# Altium PCB LF_SFF_AC_DC.PcbDoc
Units mm, origin at the board's own origin, x right, y up, seen from the top; angles counter-clockwise.
Board outline 100 x 100 mm, 2 copper layers (Top Layer, Bottom Layer); 65 components, 134 nets, 450 pads, 39 vias.
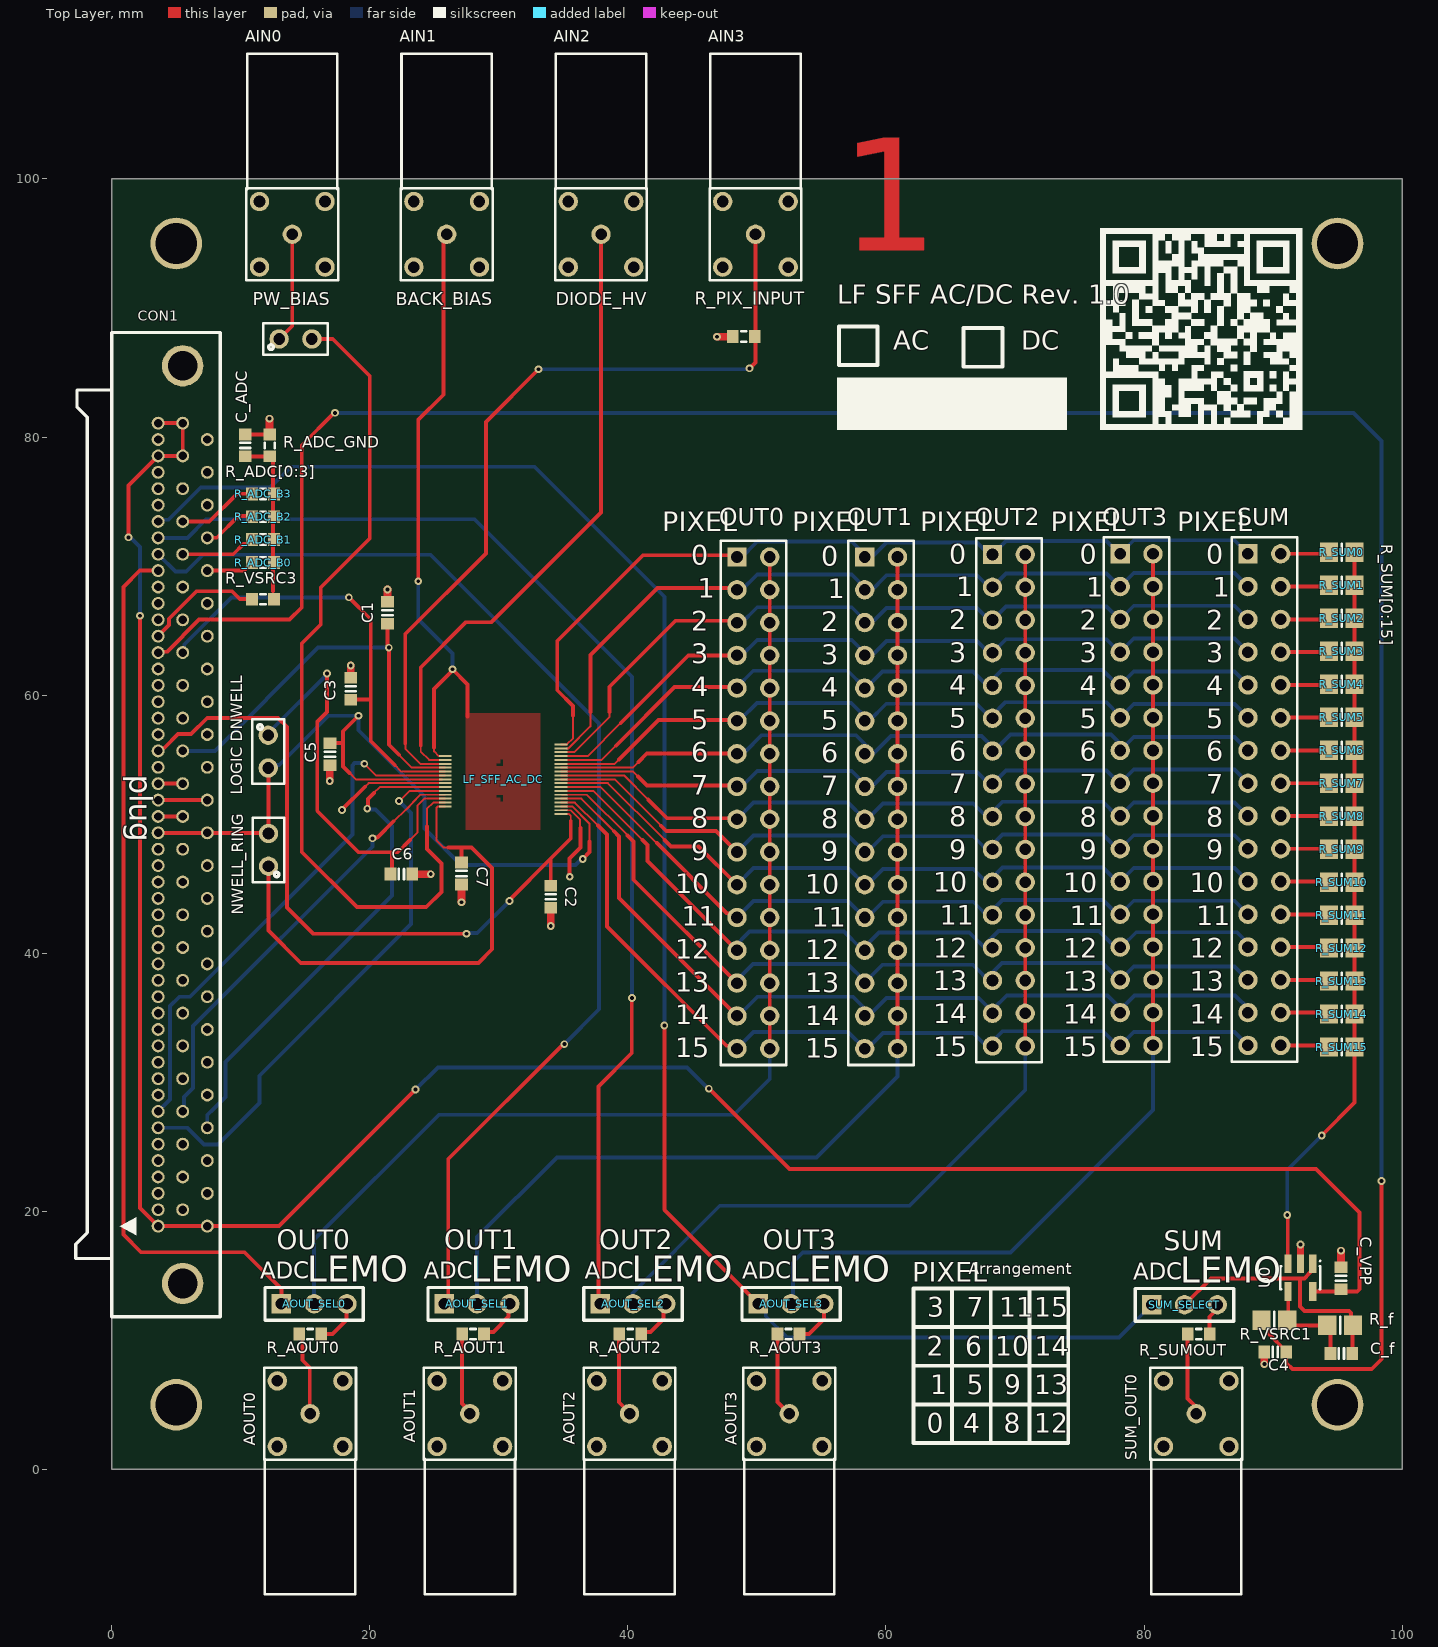
[diagram p0: Top Layer view]
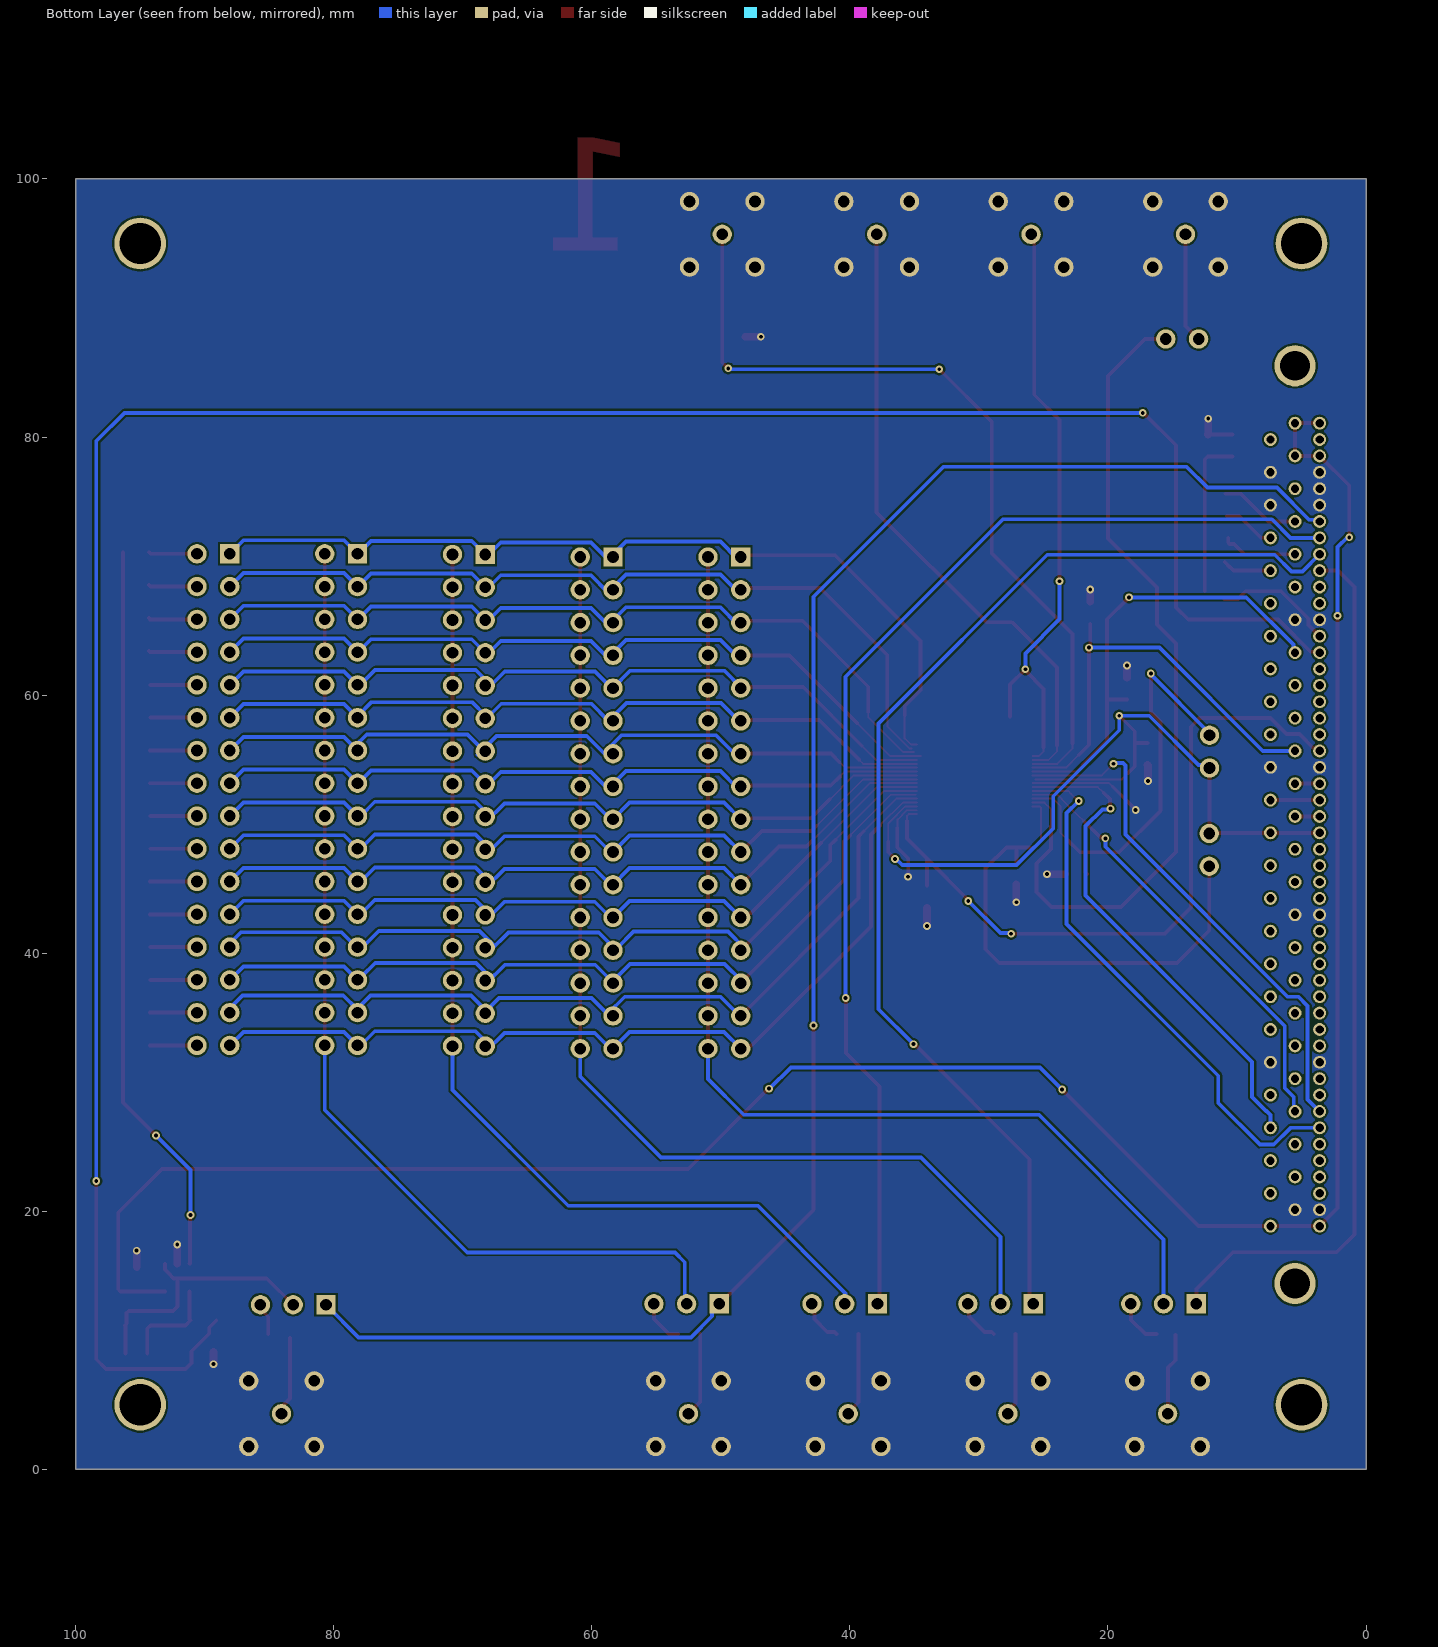
[diagram p1: Bottom Layer view, seen from below]

## Layer stack, top to bottom
Top Solder: solder mask 0.0102, Solder Resist, Dk 3.5
Top Layer: signal copper 0.0356
Dielectric1: dielectric 0.32, FR-4, Dk 4.8
Bottom Layer: signal copper 0.0356
Bottom Solder: solder mask 0.0102, Solder Resist, Dk 3.5

## Board outline
0,0 0,100 100,100 100,0

## Design rules (kind name [scope] priority, off if disabled: settings)
Clearance Clearance_LF_SFF [(IsPad AND HasFootprint('LF_SFF_COMBI'))] p1: gap=0.15 ignorepadtopadclearanceinfootprint=FALSE except(0: Arc-Hole Track-Hole SMDPad-Hole THPad-Hole Via-Hole Fill-Hole Poly-Hole Region-Hole Text-Hole; 0.05: Arc-Arc Arc-Track Track-Track)
Clearance [All] p2: gap=0.15 ignorepadtopadclearanceinfootprint=FALSE except(0: Arc-Hole Track-Hole SMDPad-Hole THPad-Hole Via-Hole Fill-Hole Poly-Hole Region-Hole Text-Hole)
ComponentClearance [All] p1: gap=0.05 collisioncheckmode=3 verticalgap=0.254 showdistances=FALSE
DiffPairsRouting [All] p1: maxlimit=0.254 minlimit=0.254 mostfreqgap=0.254 toplayer_minwidth=0.381 toplayer_maxwidth=0.381 toplayer_prefwidth=0.381 bottomlayer_minwidth=0.381 bottomlayer_maxwidth=0.381 bottomlayer_prefwidth=0.381 maxuncoupledlength=12.7
HoleSize [All] p1: absolutevalues=TRUE maxlimit=20 minlimit=0.025 maxpercent=80.000 minpercent=20.000
PlaneClearance [All] p1: clearance=0.15
PlaneConnect [All] p1: planeconnectstyle=Direct reliefexpansion=0.508 reliefentries=4 reliefconductorwidth=0.254 reliefairgap=0.254
PolygonConnect [All] p1: connectstyle=Direct reliefconductorwidth=0.254 reliefentries=4 polygonreliefangle="90 Angle" airgapwidth=0.254
RoutingVias [All] p1: holewidth=0.711 width=1.27 viastyle="Through Hole" minholewidth=0.3 minwidth=0.6 maxholewidth=0.711 maxwidth=1.27
SilkToSolderMaskClearance SilkToSolderMaskClearanceException [(OnLayer('Top Overlay')) vs (HasFootprint('HDR2X16') OR HasFootprint('LF_SFF_COMBI') OR HasFootprint('CON 1x2 std'))] p1: minsilkscreentomaskgap=0 clearancetoexposedcopper=TRUE
SilkToSolderMaskClearance SilkscreenOverComponentPads [IsPad] p2: minsilkscreentomaskgap=0.254 clearancetoexposedcopper=TRUE
SolderMaskExpansion [All] p1: expansion=0.102 istentingtop=FALSE
Width [All] p1: maxlimit=5 minlimit=0.15 preferedwidth=0.2
24 further rules are at their usual default settings.

## Classes and differential pairs
net class OUT[15..0]: OUT0 OUT1 OUT2 OUT3 OUT4 OUT5 OUT6 OUT7 OUT8 OUT9 OUT10 OUT11 OUT12 OUT13 OUT14 OUT15
component class GPACConnector: CON1
net class AUX_ADC[3..0]: AUX_ADC0 AUX_ADC1 AUX_ADC2 AUX_ADC3
net class DIN[7..0]: DIN0 DIN1 DIN2 DIN3 DIN4 DIN5 DIN6 DIN7
net class DOUT[15..0]: DOUT0 DOUT1 DOUT2 DOUT3 DOUT4 DOUT5 DOUT6 DOUT7 DOUT8 DOUT9 DOUT10 DOUT11 DOUT12 DOUT13 DOUT14 DOUT15
net class FAST_ADC[3..0]: FAST_ADC0 FAST_ADC1 FAST_ADC2 FAST_ADC3
net class FAST_ADC_B[3..0]: FAST_ADC_B0 FAST_ADC_B1 FAST_ADC_B2 FAST_ADC_B3
net class ISRC[11..0]: ISRC0 ISRC1 ISRC2 ISRC3 ISRC4 ISRC5 ISRC6 ISRC7 ISRC8 ISRC9 ISRC10 ISRC11
net class PWR[3..0]: PWR0 PWR1 PWR2 PWR3
net class VSRC[3..0]: VSRC0 VSRC1 VSRC2 VSRC3
differential pair LVDS_OUT3: +LVDS_OUT3_P -LVDS_OUT3_N
differential pair LVDS_OUT2: +LVDS_OUT2_P -LVDS_OUT2_N
differential pair LVDS_OUT1: +LVDS_OUT1_P -LVDS_OUT1_N
differential pair LVDS_OUT0: +LVDS_OUT0_P -LVDS_OUT0_N
differential pair LVDS_IN3: +LVDS_IN3_P -LVDS_IN3_N
differential pair LVDS_IN2: +LVDS_IN2_P -LVDS_IN2_N
differential pair LVDS_IN1: +LVDS_IN1_P -LVDS_IN1_N
differential pair LVDS_IN0: +LVDS_IN0_P -LVDS_IN0_N

## Components (designator, comment, footprint, x,y, rotation, side; value= is the part's Value field where it differs from the comment)
AIN0 "-" "LEMO horiz." 13.99,95.71 r0 top
AIN1 "-" "LEMO horiz." 25.957,95.71 r0 top
AIN2 "-" "LEMO horiz." 37.923,95.71 r0 top
AIN3 "-" "LEMO horiz." 49.89,95.71 r0 top
AOUT0 "-" "LEMO horiz." 15.375,4.31 r180 top
AOUT1 "-" "LEMO horiz." 27.753,4.31 r180 top
AOUT2 "-" "LEMO horiz." 40.132,4.31 r180 top
AOUT3 "-" "LEMO horiz." 52.51,4.31 r180 top
AOUT_SEL0 "-" "HDR 1x3" 15.69,12.825 r0 top
AOUT_SEL1 "-" "HDR 1x3" 28.315,12.825 r0 top
AOUT_SEL2 "-" "HDR 1x3" 40.4,12.825 r0 top
AOUT_SEL3 "-" "HDR 1x3" 52.65,12.825 r0 top
C1 "X7R" C0603_imp_N 21.375,66.375 r90 top value=100n
C2 "X7R" C0603_imp_N 34.025,44.375 r270 top value=100n
C3 "X7R" C0603_imp_N 18.525,60.5 r90 top value=100n
C4 "X7R" C0603_imp_N 90.175,9.1 r180 top value=100n
C5 "X7R" C0603_imp_N 16.925,55.425 r270 top value=100n
C6 "X7R" C0603_imp_N 22.45,46.125 r0 top value=100n
C7 "X7R" C0603_imp_N 27.1,46.175 r270 top value=100n
C_ADC "X7R" C0603_imp_N 10.35,79.35 r270 top value=100n
C_f "X7R" C0603_imp_N 95.3,8.975 r0 top value=10p
C_VPP "X7R" C0603_imp_N 95.275,14.8 r270 top value=100n
CON1 "-" "KEL 8911-100-178L-F, PLUG" 5.5,14.4 r270 top locked
LF_SFF_AC_DC "LF_SFF_AC_DC" LF_SFF_COMBI 30.325,54.075 r270 top locked
"LOGIC DNWELL" "-" "CON 1x2 std" 12.125,56.89 r270 top
NWELL_RING "-" "CON 1x2 std" 12.15,46.735 r90 top
OUT0 "Header 16X2" HDR2X16 48.455,70.7 r270 top
OUT1 "Header 16X2" HDR2X16 58.355,70.7 r270 top
OUT2 "Header 16X2" HDR2X16 68.255,70.9 r270 top
OUT3 "Header 16X2" HDR2X16 78.155,70.95 r270 top
PW_BIAS "-" "CON 1x2 std" 12.975,87.6 r0 top
R_ADC_B0 "R" R0603_imp_N 11.725,70.275 r0 top value=100
R_ADC_B1 "R" R0603_imp_N 11.725,72.05 r0 top value=100
R_ADC_B2 "R" R0603_imp_N 11.725,73.825 r0 top value=100
R_ADC_B3 "R" R0603_imp_N 11.725,75.6 r0 top value=100
R_ADC_GND "R" R0603_imp_N 12.25,79.35 r270 top value=1k
R_AOUT0 "R" R0603_imp_N 15.375,10.475 r0 top value=50
R_AOUT1 "R" R0603_imp_N 28,10.475 r0 top value=50
R_AOUT2 "R" R0603_imp_N 40.175,10.475 r0 top value=50
R_AOUT3 "R" R0603_imp_N 52.45,10.475 r0 top value=50
R_f "R" R0805_imp_M 95.2,11.15 r0 top value=1k
R_PIX_INPUT "R" R0603_imp_N 48.975,87.8 r180 top value=50
R_SUM0 "R" R0805_imp_M 95.325,71.075 r0 top value=1k
R_SUM1 "R" R0805_imp_M 95.325,68.518 r0 top value=1k
R_SUM2 "R" R0805_imp_M 95.325,65.962 r0 top value=1k
R_SUM3 "R" R0805_imp_M 95.325,63.405 r0 top value=1k
R_SUM4 "R" R0805_imp_M 95.325,60.848 r0 top value=1k
R_SUM5 "R" R0805_imp_M 95.325,58.292 r0 top value=1k
R_SUM6 "R" R0805_imp_M 95.325,55.735 r0 top value=1k
R_SUM7 "R" R0805_imp_M 95.325,53.178 r0 top value=1k
R_SUM8 "R" R0805_imp_M 95.325,50.622 r0 top value=1k
R_SUM9 "R" R0805_imp_M 95.325,48.065 r0 top value=1k
R_SUM10 "R" R0805_imp_M 95.325,45.508 r0 top value=1k
R_SUM11 "R" R0805_imp_M 95.325,42.952 r0 top value=1k
R_SUM12 "R" R0805_imp_M 95.325,40.395 r0 top value=1k
R_SUM13 "R" R0805_imp_M 95.325,37.838 r0 top value=1k
R_SUM14 "R" R0805_imp_M 95.325,35.282 r0 top value=1k
R_SUM15 "R" R0805_imp_M 95.325,32.725 r0 top value=1k
R_SUMOUT "R" R0603_imp_N 84.25,10.475 r0 top value=50
R_VSRC1 "R" R0805_imp_M 90.1,11.55 r180 top value=1k
R_VSRC3 "R" R0603_imp_N 11.725,67.425 r180 top value=1k
SUM "Header 16X2" HDR2X16 88.055,70.95 r270 top
SUM_OUT0 "-" "LEMO horiz." 84.05,4.31 r180 top
SUM_SELECT "-" "HDR 1x3" 83.14,12.75 r0 top
U0 "OPA237" SOT23-5 92.125,14.85 r180 top value=-

## Footprints (in the part's own frame and the unit in brackets; to place one, negate y for a bottom-side part, rotate by r counter-clockwise, add the part's x,y. Pads: shape width x height; smd on the part's side, far side on the other; paste and mask are expansions set on the pad)
C0603_imp_N [mm] "Chip Capacitor, Body 1.6x0.8mm, IPC Medium Density"
  rect 0.9x1 smd: 1(-0.85,0) 2(0.85,0)
  silkscreen extent -0.2,-0.4 0.2,0.4, body extent -0.87,-0.48 0.87,0.48, height 0.85
"CON 1x2 std" [mm]
  round 1.5 hole 0.9: 1(0,0) 2(2.54,0)
  silkscreen extent -1.23,-1.23 3.77,1.23
HDR2X16 [mm] "Connector; Header; 16x2 Position"
  rect 1.5x1.5 hole 0.9: 1(0,0)
  round 1.5 hole 0.9: 2(0,2.54) 3(2.54,0) 4(2.54,2.54) 5(5.08,0) 6(5.08,2.54) 7(7.62,0) 8(7.62,2.54) 9(10.16,0) 10(10.16,2.54) 11(12.7,0) 12(12.7,2.54) 13(15.24,0) 14(15.24,2.54) 15(17.78,0) 16(17.78,2.54) 17(20.32,0) 18(20.32,2.54) 19(22.86,0) 20(22.86,2.54) 21(25.4,0) 22(25.4,2.54) 23(27.94,0) 24(27.94,2.54) 25(30.48,0) 26(30.48,2.54) 27(33.02,0) 28(33.02,2.54) 29(35.56,0) 30(35.56,2.54) 31(38.1,0) 32(38.1,2.54)
  silkscreen extent -1.27,-1.27 39.37,3.81
"HDR 1x3" [mm] "Steckjumper 3 pins"
  rect 1.5x1.5 hole 0.9: 1(-2.54,0)
  round 1.5 hole 0.9: 2(0,0) 3(2.54,0)
  silkscreen extent -3.81,-1.27 3.81,1.27
"KEL 8911-100-178L-F, PLUG" [mm] "100 pin plug,  board to board, right angle"
  round 1 hole 0.65: 1(-4.445,1.905) 2(-4.445,-1.905) 3(-5.715,0) 4(-5.715,-1.905) 5(-6.985,1.905) 6(-6.985,-1.905) 7(-8.255,0) 8(-8.255,-1.905) 9(-9.525,1.905) 10(-9.525,-1.905) 11(-10.795,0) 12(-10.795,-1.905) 13(-12.065,1.905) 14(-12.065,-1.905) 15(-13.335,0) 16(-13.335,-1.905) 17(-14.605,1.905) 18(-14.605,-1.905) 19(-15.875,0) 20(-15.875,-1.905) 21(-17.145,1.905) 22(-17.145,-1.905) 23(-18.415,0) 24(-18.415,-1.905) 25(-19.685,1.905) 26(-19.685,-1.905) 27(-20.955,0) 28(-20.955,-1.905) 29(-22.225,1.905) 30(-22.225,-1.905) 31(-23.495,0) 32(-23.495,-1.905) 33(-24.765,1.905) 34(-24.765,-1.905) 35(-26.035,0) 36(-26.035,-1.905) 37(-27.305,1.905) 38(-27.305,-1.905) 39(-28.575,0) 40(-28.575,-1.905) 41(-29.845,1.905) 42(-29.845,-1.905) 43(-31.115,0) 44(-31.115,-1.905) 45(-32.385,1.905) 46(-32.385,-1.905) 47(-33.655,0) 48(-33.655,-1.905) 49(-34.925,1.905) 50(-34.925,-1.905) 51(-36.195,0) 52(-36.195,-1.905) 53(-37.465,1.905) 54(-37.465,-1.905) 55(-38.735,0) 56(-38.735,-1.905) 57(-40.005,1.905) 58(-40.005,-1.905) 59(-41.275,0) 60(-41.275,-1.905) 61(-42.545,1.905) 62(-42.545,-1.905) 63(-43.815,0) 64(-43.815,-1.905) 65(-45.085,1.905) 66(-45.085,-1.905) 67(-46.355,0) 68(-46.355,-1.905) 69(-47.625,1.905) 70(-47.625,-1.905) 71(-48.895,0) 72(-48.895,-1.905) 73(-50.165,1.905) 74(-50.165,-1.905) 75(-51.435,0) 76(-51.435,-1.905) 77(-52.705,1.905) 78(-52.705,-1.905) 79(-53.975,0) 80(-53.975,-1.905) 81(-55.245,1.905) 82(-55.245,-1.905) 83(-56.515,0) 84(-56.515,-1.905) 85(-57.785,1.905) 86(-57.785,-1.905) 87(-59.055,0) 88(-59.055,-1.905) 89(-60.325,1.905) 90(-60.325,-1.905) 91(-61.595,0) 92(-61.595,-1.905) 93(-62.865,1.905) 94(-62.865,-1.905) 95(-64.135,0) 96(-64.135,-1.905) 97(-65.405,1.905) 98(-65.405,-1.905) 99(-66.675,0) 100(-66.675,-1.905)
  round 3.2 hole 2.3: L1(0,0) L2(-71.12,0)
  silkscreen extent -73.7,-8.29 2.58,2.9
"LEMO horiz." [mm] "LEMO Buchse, liegend"
  round 1.5 hole 0.9: 1(0,0) 2(-2.54,-2.54) 2(-2.54,2.54) 2(2.54,-2.54) 2(2.54,2.54)
  silkscreen extent -3.56,-3.56 3.56,14, body extent -3.5,-3.56 3.5,13.94, height 7
LF_SFF_COMBI [mm]
  rect 0.15x1 smd mask+0: BACK_BIAS(-1.2,-4.481) DIODE_HV(-0.9,-4.481) IBN(3.3,4.481) IBP(-0.3,-4.481) LOGIC_DNWELL(2.1,-4.481) NWELL_RING(2.7,-4.481) OUT0(-2.1,4.481) OUT1(-1.8,4.481) OUT2(-1.5,4.481) OUT3(-1.2,4.481) OUT4(-0.9,4.481) OUT5(-0.6,4.481) OUT6(-0.3,4.481) OUT7(0,4.481) OUT8(0.3,4.481) OUT9(0.6,4.481) OUT10(0.9,4.481) OUT11(1.2,4.481) OUT12(1.5,4.481) OUT13(1.8,4.481) OUT14(2.1,4.481) OUT15(2.4,4.481) PIX_INPUT(-0.6,-4.481) PW_BIAS(2.4,-4.481) RESET(0.3,-4.481) SEL0(1.2,-4.481) SEL1(1.5,-4.481) SEL2(1.8,-4.481) VDD(0.6,-4.481) VDD(2.7,4.481) VRESET(0,-4.481) VSS(0.9,-4.481) VSS(3,4.481)
  body extent -4.5,-2.89 4.51,2.87, height 0.3
R0603_imp_N [mm] "Chip Resistor, Body 1.6x0.8mm, IPC Medium Density"
  rect 0.9x1 smd: 1(-0.85,0) 2(0.85,0)
  silkscreen extent -0.2,-0.4 0.2,0.4, body extent -0.85,-0.48 0.85,0.48, height 0.6
R0805_imp_M [mm] "Chip Resistor, Body 2.0x1.3mm, IPC Low Density"
  rect 1.4x1.5 smd: 1(-1,0) 2(1,0)
  silkscreen extent 0,-0.65 0,0.65, body extent -1.07,-0.7 1.07,0.7, height 0.65
SOT23-5 [mm] "SOT-23/SC-74A; 5 Leads; Body 3.1 x 3 mm, inc. leads (LxW max)"
  rect 0.55x1.45 smd: 1(-0.95,-1.075) 2(0,-1.075) 3(0.95,-1.075) 4(0.95,1.075) 5(-0.95,1.075)
  silkscreen extent -1.58,-1.35 1.55,0.9

## Part data
AIN0 AIN1 AIN2 AIN3 AOUT0 AOUT1 AOUT2 AOUT3 SUM_OUT0: library part "LEMO coax", "LEMO/BNC Buchse, aufrecht od. gewinkelt", Class=Connector, Comment_1=LEMO, Constraints=-, HelpURL=-, LatestRevisionDate=24-Sep-2008, PackageDescription=-, Publisher="Silab C.H.", Type_1=EPL.00.250.NTN
AOUT_SEL0 AOUT_SEL1 AOUT_SEL2 AOUT_SEL3 SUM_SELECT: library part "JUMPER 1X3S", "Jumper, Solderbridge 1x3", Class=Connector, Comment_1=-, Constraints=-, HelpURL=-, LatestRevisionDate=24-Sep-2008, PackageDescription=-, Publisher="Silab C.H.", Type_1=-
C1 C2 C3 C4 C5 C6 C7 C_ADC C_f C_VPP: library part C, "Capacitor", Class=Passive, Comment_1=-, Constraints=6.3V, HelpURL=-, LatestRevisionDate=27-Nov-2007, PackageDescription=-, Publisher="Silab J.S.", Type_1="SMD Chip Capacitor"
CON1: library part "CON KEL 8911, male", "KEL 8911 100 pin board to board connector", Class=Connector, Comment_1=KEL, Constraints=-, HelpURL=http://www.kel.jp/english/product/Half_8900/8900.pdf, LatestRevisionDate=24-Sep-2008, PackageDescription=-, Publisher="Silab J.S.", Revision="July-2002: Re-released for DXP Platform.", Type_1=8911-100-178L-F
LF_SFF_AC_DC: library part LF_SFF_AC
"LOGIC DNWELL" NWELL_RING PW_BIAS: library part "JUMPER 1X2S", "Jumper, Solderbridge 1x2", Class=Connector, Comment_1=-, Constraints=-, HelpURL=-, LatestRevisionDate=24-Sep-2008, PackageDescription=-, Publisher="Silab C.H.", Type_1=-
OUT0 OUT1 OUT2 OUT3 SUM: "Header, 16-Pin, Dual row", LatestRevisionDate=17-Jul-2002, LatestRevisionNote="Re-released for DXP Platform.", Publisher="Altium Limited"
R_ADC_B0 R_ADC_B1 R_ADC_B2 R_ADC_B3 R_ADC_GND R_AOUT0 R_AOUT1 R_AOUT2 R_AOUT3 R_f R_PIX_INPUT R_SUM0 R_SUM1 R_SUM2 R_SUM3 R_SUM4 R_SUM5 R_SUM6 R_SUM7 R_SUM8 R_SUM9 R_SUM10 R_SUM11 R_SUM12 R_SUM13 R_SUM14 R_SUM15 R_SUMOUT R_VSRC1 R_VSRC3: "SMD Chip Resistor", Class=Passive, Comment_1=-, Constraints=1%, HelpURL=-, LatestRevisionDate=27-Nov-2007, PackageDescription=-, Publisher="Silab J.S.", Type_1="SMD Chip Resistor"
U0: "OpAmp (TI), single supply up to +36V;", Class=Active, Comment_1="Texas Instruments", Constraints=-, Distributor=Farnell, HelpURL=http://focus.ti.com/lit/ds/symlink/opa237.pdf, LatestRevisionDate=26-Aug-2009, Netto_price=1,58, Order_number=1207102, PackageDescription=-, Publisher="Silab J.S.", Type_1=OPA237NA

## Free pads (board coordinates)
  round 4 hole 3.2: L1(5,5) L2(95,5) L3(95,95) L4(5,95)

## Via types
v1: diameter 0.6, hole 0.3, Top Layer to Bottom Layer, 39 vias

## Nets (pads, with @x,y where several pads share a name; then routed paths per layer and width w, separated by ;. In a path a pad name is that pad's centre, name@x,y a point inside that pad or via, vN(x,y) a via of type N, cw(c..) or ccw(c..) an arc to the next point about the centre after c; other vN are vias at no path point)
AOUT0: AOUT_SEL0.2 OUT0.2 OUT0.4 OUT0.6 OUT0.8 OUT0.10 OUT0.12 OUT0.14 OUT0.16 OUT0.18 OUT0.20 OUT0.22 OUT0.24 OUT0.26 OUT0.28 OUT0.30 OUT0.32 | length 85.9
  Top Layer w0.3: OUT0.32 OUT0.30 OUT0.28 OUT0.26 OUT0.24 OUT0.22 OUT0.20 OUT0.18 OUT0.16 OUT0.14 OUT0.12 OUT0.10 OUT0.8 OUT0.6 OUT0.4 OUT0.2
  Bottom Layer w0.3: AOUT_SEL0.2 15.69,17.815 25.35,27.475 48.22,27.475 50.995,30.25 OUT0.32
AOUT1: AOUT_SEL1.2 OUT1.2 OUT1.4 OUT1.6 OUT1.8 OUT1.10 OUT1.12 OUT1.14 OUT1.16 OUT1.18 OUT1.20 OUT1.22 OUT1.24 OUT1.26 OUT1.28 OUT1.30 OUT1.32 | length 83.2
  Top Layer w0.3: OUT1.32 OUT1.30 OUT1.28 OUT1.26 OUT1.24 OUT1.22 OUT1.20 OUT1.18 OUT1.16 OUT1.14 OUT1.12 OUT1.10 OUT1.8 OUT1.6 OUT1.4 OUT1.2
  Bottom Layer w0.3: AOUT_SEL1.2 28.315,17.99 34.5,24.175 54.625,24.175 60.895,30.445 OUT1.32
AOUT2: AOUT_SEL2.2 OUT2.2 OUT2.4 OUT2.6 OUT2.8 OUT2.10 OUT2.12 OUT2.14 OUT2.16 OUT2.18 OUT2.20 OUT2.22 OUT2.24 OUT2.26 OUT2.28 OUT2.30 OUT2.32 | length 79.3
  Top Layer w0.3: OUT2.32 OUT2.30 OUT2.28 OUT2.26 OUT2.24 OUT2.22 OUT2.20 OUT2.18 OUT2.16 OUT2.14 OUT2.12 OUT2.10 OUT2.8 OUT2.6 OUT2.4 OUT2.2
  Bottom Layer w0.3: AOUT_SEL2.2 40.336,12.889 40.336,13.636 47.125,20.425 61.825,20.425 70.795,29.395 OUT2.32
AOUT3: AOUT_SEL3.2 OUT3.2 OUT3.4 OUT3.6 OUT3.8 OUT3.10 OUT3.12 OUT3.14 OUT3.16 OUT3.18 OUT3.20 OUT3.22 OUT3.24 OUT3.26 OUT3.28 OUT3.30 OUT3.32 | length 79.6
  Top Layer w0.3: OUT3.32 OUT3.30 OUT3.28 OUT3.26 OUT3.24 OUT3.22 OUT3.20 OUT3.18 OUT3.16 OUT3.14 OUT3.12 OUT3.10 OUT3.8 OUT3.6 OUT3.4 OUT3.2
  Bottom Layer w0.3: AOUT_SEL3.2@52.8,12.331 52.8,16.05 53.55,16.8 69.65,16.8 80.695,27.845 OUT3.32
AUX_ADC0: CON1.77
AUX_ADC1: CON1.78
AUX_ADC2: CON1.79
AUX_ADC3: CON1.80
BACK_BIAS: AIN1.1 LF_SFF_AC_DC.BACK_BIAS | length 47.7
  Top Layer w0.15: 24.98,55.926 24.98,55.645 25.35,55.275 LF_SFF_AC_DC.BACK_BIAS ; v1@26.4,61.896 v1(26.4,62)
  Top Layer w0.3: v1(23.75,68.825) 23.75,81.313 25.715,83.278 AIN1.1@25.715,95.685 ; 24.98,55.926 24.98,60.476 v1@26.4,61.896 ; v1(26.4,62) 27.586,60.814 27.586,58.324
  Bottom Layer w0.3: v1(23.75,68.825) 23.75,65.883 26.4,63.233 v1(26.4,62)
C_LOGIC_DNWELL: C7.1 LF_SFF_AC_DC.NWELL_RING NWELL_RING.1 | length 39.7
  Top Layer w0.15: LF_SFF_AC_DC.NWELL_RING 25.275,51.375 25.175,51.275 25.175,48.725 25.7,48.2 26.113,48.2
  Top Layer w0.3: NWELL_RING.1 12.15,41.75 14.65,39.25 28.425,39.25 29.475,40.3 29.475,46.6 27.875,48.2 27.1,48.2 ; 26.113,48.2 27.1,48.2 ; C7.1 27.1,48.2
C_NWELL_RING: "LOGIC DNWELL.1" C6.1 LF_SFF_AC_DC.LOGIC_DNWELL | length 33.6
  Top Layer w0.15: 23.125,48.781 23.681,49.337 23.681,51.419 24.238,51.975 LF_SFF_AC_DC.LOGIC_DNWELL
  Top Layer w0.3: v1(16.675,61.675) 16.675,58.699 16.013,58.037 15.925,57.949 15.925,51.032 19.132,47.825 21.6,47.825 21.725,47.825 ; C6.1 21.725,46.25 21.725,47.825 ; 23.125,48.781 22.169,47.825 21.725,47.825
  Bottom Layer w0.3: 12.125,56.89 12.125,57.044 16.675,61.594 v1(16.675,61.675)
DIN0: CON1.5
DIN1: CON1.6
DIN2: CON1.7
DIN3: CON1.8
DIN4: CON1.9
DIN5: CON1.10
DIN6: CON1.11
DIN7: CON1.12
DIODE_HV: AIN2.1 LF_SFF_AC_DC.DIODE_HV | length 49.2
  Top Layer w0.15: 23.95,56.075 23.95,55.625 24.6,54.975 LF_SFF_AC_DC.DIODE_HV
  Top Layer w0.3: 23.95,56.075 23.95,62.15 27.45,65.65 29.425,65.65 37.923,74.148 AIN2.1
DOUT0: CON1.13 LF_SFF_AC_DC.SEL0 | length 39
  Top Layer w0.15: 20.324,52.424 20.775,52.875 LF_SFF_AC_DC.SEL0
  Top Layer w0.3: v1(19.8,51.2) 19.85,51.25 19.85,51.95 20.324,52.424
  Bottom Layer w0.3: CON1.13 7.405,27.469 7.711,27.775 7.739,27.775 8.825,28.861 8.825,31.575 21.725,44.475 21.725,49.85 20.436,51.139 20.073,51.139 20.07,51.143 19.857,51.143 v1(19.8,51.2)
DOUT1: CON1.14 LF_SFF_AC_DC.SEL1 | length 42.3
  Top Layer w0.15: v1(22.264,51.79) 22.873,52.361 23.087,52.575 LF_SFF_AC_DC.SEL1
  Bottom Layer w0.3: CON1.14 5.86,26.465 7.15,25.175 8.225,25.175 11.45,28.4 11.45,30.5 23.2,42.25 23.2,50.854 v1(22.264,51.79)
DOUT2: CON1.15 LF_SFF_AC_DC.SEL2 | length 34.3
  Top Layer w0.15: 21.85,50.225 22.838,51.146 22.84,51.147 ccw(c22.734,51.254) 22.843,51.15 23.827,52.187 23.915,52.275 LF_SFF_AC_DC.SEL2
  Top Layer w0.3: v1(20.2,48.9) 20.257,48.957 20.582,48.957 21.85,50.225
  Bottom Layer w0.3: CON1.15 5.602,27.837 5.602,28.846 6.3,29.544 6.3,34.35 20.2,48.25 v1(20.2,48.9)
DOUT3: CON1.16 LF_SFF_AC_DC.RESET | length 41.2
  Top Layer w0.15: v1(19.575,54.675) 20.475,53.775 LF_SFF_AC_DC.RESET
  Bottom Layer w0.3: CON1.16 4.521,28.661 4.521,35.907 5.239,36.625 6.075,36.625 18.65,49.2 18.65,54.557 18.826,54.732 19.518,54.732 v1(19.575,54.675)
DOUT4: CON1.17
DOUT5: CON1.18
DOUT6: CON1.19
DOUT7: CON1.20
DOUT8: CON1.23
DOUT9: CON1.24
DOUT10: CON1.25
DOUT11: CON1.26
DOUT12: CON1.27
DOUT13: CON1.28
DOUT14: CON1.29
DOUT15: CON1.30
FAST_ADC0: AOUT_SEL0.1 CON1.82 | length 68.5
  Top Layer w0.3: CON1.82 2.17,69.645 0.9,68.375 0.9,18.201 2.276,16.825 10.3,16.825 13.15,13.975 AOUT_SEL0.1
FAST_ADC1: AOUT_SEL1.1 CON1.84 | length 91
  Top Layer w0.3: AOUT_SEL1.1@26.075,12.425 26.075,24.025 35,32.95 v1(35.075,32.95)
  Bottom Layer w0.3: CON1.84 4.936,69.574 5.774,69.574 7.075,70.875 24.7,70.875 37.775,57.8 37.775,35.65 v1(35.075,32.95)
FAST_ADC2: AOUT_SEL2.1 CON1.86 | length 92.1
  Top Layer w0.3: AOUT_SEL2.1@37.716,12.829 37.716,29.666 40.3,32.25 40.3,36.5 v1(40.325,36.525)
  Bottom Layer w0.3: CON1.86 5.86,72.185 7.3,73.625 28.125,73.625 40.325,61.425 v1(40.325,36.525)
FAST_ADC3: AOUT_SEL3.1 CON1.88 SUM_SELECT.1 | length 136.2
  Top Layer w0.3: v1(42.825,34.4) 42.825,20.11 AOUT_SEL3.1
  Bottom Layer w0.3: CON1.88 3.729,73.589 4.414,73.589 6.9,76.075 12.275,76.075 13.9,77.7 32.75,77.7 42.825,67.625 v1(42.825,34.4) ; AOUT_SEL3.1@49.693,12.853 50.056,12.853 50.684,12.225 50.684,11.862 52.325,10.221 78.071,10.221 SUM_SELECT.1
FAST_ADC_B0: CON1.81 R_ADC_B0.1 | length 3.8
  Top Layer w0.3: CON1.81 10.27,69.645 10.55,69.925 10.575,69.925 10.95,70.3 R_ADC_B0.1@10.95,70.325
FAST_ADC_B1: CON1.83 R_ADC_B1.1 | length 5.9
  Top Layer w0.3: CON1.83 9.415,70.915 10.219,71.719 10.575,71.719 10.673,71.817 R_ADC_B1.1@10.673,72.173
FAST_ADC_B2: CON1.85 R_ADC_B2.1 | length 4.1
  Top Layer w0.3: CON1.85 7.412,72.192 8.142,72.192 9.825,73.875 R_ADC_B2.1@10.796,73.875
FAST_ADC_B3: CON1.87 R_ADC_B3.1 | length 6.3
  Top Layer w0.3: CON1.87 7.555,73.455 9.699,75.599 10.874,75.599 R_ADC_B3.1
GND: AIN0.2 AIN1.2 AIN2.2 AIN3.2 AOUT0.2 AOUT1.2 AOUT2.2 AOUT3.2 C1.2 C2.2 C3.2 C4.2 C5.2 C6.2 C7.2 C_ADC.1 C_VPP.1 CON1.3 CON1.4 CON1.21 CON1.22 CON1.39 CON1.40 CON1.57 CON1.58 CON1.75 CON1.76 CON1.89 CON1.90 CON1.92 CON1.93 CON1.94 LF_SFF_AC_DC.VSS R_ADC_GND.1 R_PIX_INPUT.2 SUM_OUT0.2 U0.2 | length 30.9
  Top Layer w0.15: 19.625,52.9 19.9,53.175 LF_SFF_AC_DC.VSS@25.844,53.175 ; LF_SFF_AC_DC.VSS@34.806,51.075 35.575,51.075 36.3,50.35 36.3,49.725 36.325,49.7
  Top Layer w0.3: C_ADC.1 R_ADC_GND.1 ; v1(17.85,51.1) 17.85,51.125 19.625,52.9 ; v1(35.5,45.925) 35.475,45.95 35.475,47.325 36.325,48.175 36.325,49.7
  Top Layer w0.55: U0.2 92.125,17.422 v1(92.129,17.425)
  Top Layer w0.6: v1(12.225,81.425) 12.225,80.225 R_ADC_GND.1 ; v1(16.9,53.35) 16.9,54.55 C5.2 ; C3.2 v1(18.525,62.3) ; C1.2 v1(21.375,68.175) ; C6.2 v1(24.725,46.125) ; v1(27.1,43.95) C7.2 ; v1(34.025,42.1) C2.2 ; v1(46.9,87.775) R_PIX_INPUT.2@48.1,87.775 ; v1(89.325,8.15) C4.2 ; C_VPP.1 v1(95.276,16.944)
INJ: CON1.91
ISRC0: C1.1 CON1.59 LF_SFF_AC_DC.IBP | length 33.8
  Top Layer w0.15: 22.25,55.375 23.25,54.375 LF_SFF_AC_DC.IBP
  Top Layer w0.3: C1.1 21.375,63.856 21.475,63.756 v1(21.475,63.675) 21.475,56.15 22.25,55.375
  Bottom Layer w0.3: CON1.59 8,55.675 16,63.675 v1(21.475,63.675)
ISRC1: C2.1 CON1.60 LF_SFF_AC_DC.IBN | length 56
  Top Layer w0.15: LF_SFF_AC_DC.IBN 35.451,50.775 35.575,50.651 35.575,50.25
  Top Layer w0.3: CON1.60 3.784,55.675 4.029,55.919 4.094,55.919 5.15,56.975 6.15,56.975 7.4,58.225 12.9,58.225 13.575,57.55 13.575,43.55 15.625,41.5 v1(27.5,41.5) ; v1(30.825,44.05) 30.825,44.125 34.025,47.325 ; C2.1 34.025,47.325 ; 35.575,50.25 35.575,48.875 34.025,47.325
  Bottom Layer w0.3: v1(27.5,41.5) 27.556,41.556 28.331,41.556 v1(30.825,44.05)
ISRC2: CON1.61
ISRC3: CON1.62
ISRC4: CON1.63
ISRC5: CON1.64
ISRC6: CON1.65
ISRC7: CON1.66
ISRC8: CON1.67
ISRC9: CON1.68
ISRC10: CON1.69
ISRC11: CON1.70
LVDS_IN0_N: CON1.32
LVDS_IN0_P: CON1.31
LVDS_IN1_N: CON1.34
LVDS_IN1_P: CON1.33
LVDS_IN2_N: CON1.36
LVDS_IN2_P: CON1.35
LVDS_IN3_N: CON1.38
LVDS_IN3_P: CON1.37
LVDS_OUT0_N: CON1.42
LVDS_OUT0_P: CON1.41
LVDS_OUT1_N: CON1.44
LVDS_OUT1_P: CON1.43
LVDS_OUT2_N: CON1.46
LVDS_OUT2_P: CON1.45
LVDS_OUT3_N: CON1.48
LVDS_OUT3_P: CON1.47
NetAIN0_1: AIN0.1 PW_BIAS.1 | length 8.5
  Top Layer w0.3: PW_BIAS.1 13.99,88.615 AIN0.1
NetAOUT0_1: AOUT0.1 R_AOUT0.1 | length 6.3
  Top Layer w0.3: R_AOUT0.1@14.775,10.4 14.775,8.45 15.35,7.875 15.35,4.335 AOUT0.1
NetAOUT1_1: AOUT1.1 R_AOUT1.1 | length 6.4
  Top Layer w0.3: R_AOUT1.1 27.15,5.086 27.753,4.482 AOUT1.1
NetAOUT2_1: AOUT2.1 R_AOUT2.1 | length 6.5
  Top Layer w0.3: R_AOUT2.1 39.325,5.2 40.132,4.394 AOUT2.1
NetAOUT3_1: AOUT3.1 R_AOUT3.1 | length 6.5
  Top Layer w0.3: R_AOUT3.1 51.6,5.22 AOUT3.1
NetAOUT_SEL0_3: AOUT_SEL0.3 R_AOUT0.2 | length 3.5
  Top Layer w0.3: R_AOUT0.2 17.1,10.475 18.205,11.58 AOUT_SEL0.3@18.205,12.675
NetAOUT_SEL1_3: AOUT_SEL1.3 R_AOUT1.2 | length 3.5
  Top Layer w0.3: R_AOUT1.2 29.024,10.649 29.574,10.649 30.754,11.829 30.754,12.724 AOUT_SEL1.3
NetAOUT_SEL2_3: AOUT_SEL2.3 R_AOUT2.2 | length 3.5
  Top Layer w0.3: R_AOUT2.2 41.199,10.649 41.749,10.649 42.75,11.65 42.75,12.635 AOUT_SEL2.3
NetAOUT_SEL3_3: AOUT_SEL3.3 R_AOUT3.2 | length 3.6
  Top Layer w0.3: R_AOUT3.2 54.025,10.475 55.19,11.64 AOUT_SEL3.3
NetC_ADC_2: C_ADC.2 R_ADC_B0.2 R_ADC_B1.2 R_ADC_B2.2 R_ADC_B3.2 R_ADC_GND.2 R_VSRC3.1 | length 12.4
  Top Layer w0.3: C_ADC.2 R_ADC_GND.2 12.5,78.25 12.5,68.06
NetC_f_1: C_f.1 R_f.1 R_VSRC1.1 U0.4 | length 7.8
  Top Layer w0.3: U0.4 91.175,11.625 R_VSRC1.1 91.5,11.15 R_f.1 94.45,10.9 C_f.1
NetR_SUM0_1: R_SUM0.1 SUM.2 | length 3.8
  Top Layer w0.3: SUM.2 94.2,70.95 R_SUM0.1
NetR_SUM0_2: R_SUM0.2 R_SUM1.2 R_SUM2.2 R_SUM3.2 R_SUM4.2 R_SUM5.2 R_SUM6.2 R_SUM7.2 R_SUM8.2 R_SUM9.2 R_SUM10.2 R_SUM11.2 R_SUM12.2 R_SUM13.2 R_SUM14.2 R_SUM15.2 U0.3 | length 57.3
  Top Layer w0.3: v1(91.1,19.7) 91.137,19.663 91.137,15.963 U0.3 ; v1(93.775,25.875) 96.325,28.425 R_SUM15.2 R_SUM14.2 R_SUM13.2 R_SUM12.2 R_SUM11.2 R_SUM10.2 R_SUM9.2 R_SUM8.2 R_SUM7.2 R_SUM6.2 R_SUM5.2 R_SUM4.2 R_SUM3.2 R_SUM2.2 R_SUM1.2 R_SUM0.2
  Bottom Layer w0.3: v1(91.1,19.7) 91.1,23.2 v1(93.775,25.875)
NetR_SUM1_1: R_SUM1.1 SUM.4 | length 3.8
  Top Layer w0.3: SUM.4 94.217,68.41 R_SUM1.1
NetR_SUM2_1: R_SUM2.1 SUM.6 | length 3.8
  Top Layer w0.3: SUM.6 94.233,65.87 R_SUM2.1
NetR_SUM3_1: R_SUM3.1 SUM.8 | length 3.8
  Top Layer w0.3: SUM.8 94.25,63.33 R_SUM3.1
NetR_SUM4_1: R_SUM4.1 SUM.10 | length 3.6
  Top Layer w0.3: SUM.10 R_SUM4.1@94.2,60.79
NetR_SUM5_1: R_SUM5.1 SUM.12 | length 3.6
  Top Layer w0.3: SUM.12 R_SUM5.1@94.217,58.25
NetR_SUM6_1: R_SUM6.1 SUM.14 | length 3.6
  Top Layer w0.3: SUM.14 R_SUM6.1@94.233,55.71
NetR_SUM7_1: R_SUM7.1 SUM.16 | length 3.7
  Top Layer w0.3: SUM.16 R_SUM7.1@94.25,53.17
NetR_SUM8_1: R_SUM8.1 SUM.18 | length 3.6
  Top Layer w0.3: SUM.18 R_SUM8.1@94.2,50.63
NetR_SUM9_1: R_SUM9.1 SUM.20 | length 3.6
  Top Layer w0.3: SUM.20 R_SUM9.1@94.217,48.09
NetR_SUM10_1: R_SUM10.1 SUM.22 | length 3.6
  Top Layer w0.3: SUM.22 R_SUM10.1@94.233,45.55
NetR_SUM11_1: R_SUM11.1 SUM.24 | length 3.7
  Top Layer w0.3: SUM.24 R_SUM11.1@94.25,43.01
NetR_SUM12_1: R_SUM12.1 SUM.26 | length 3.6
  Top Layer w0.3: SUM.26 R_SUM12.1@94.2,40.47
NetR_SUM13_1: R_SUM13.1 SUM.28 | length 3.6
  Top Layer w0.3: SUM.28 R_SUM13.1@94.217,37.93
NetR_SUM14_1: R_SUM14.1 SUM.30 | length 3.6
  Top Layer w0.3: SUM.30 R_SUM14.1@94.233,35.39
NetR_SUM15_1: R_SUM15.1 SUM.32 | length 3.7
  Top Layer w0.3: SUM.32 R_SUM15.1@94.25,32.85
NetR_SUMOUT_1: R_SUMOUT.1 SUM_OUT0.1 | length 6
  Top Layer w0.3: R_SUMOUT.1@83.375,10.2 83.375,5.5 84.05,4.825 SUM_OUT0.1@84.05,4.5
NetR_SUMOUT_2: R_SUMOUT.2 SUM_SELECT.3 | length 2.5
  Top Layer w0.3: R_SUMOUT.2@85.075,10.475 85.075,11.82 85.68,12.425 SUM_SELECT.3
OUT0: LF_SFF_AC_DC.OUT0 OUT0.1 OUT1.1 OUT2.1 OUT3.1 SUM.1 | length 69.3
  Top Layer w0.15: LF_SFF_AC_DC.OUT0 35.275,56.175 35.75,56.65 35.75,58.425
  Top Layer w0.3: 35.75,58.425 35.75,59.15 34.525,60.375 34.525,64.2 41.165,70.84 48.315,70.84 OUT0.1
  Bottom Layer w0.3: OUT0.1@48.74,70.6 50.03,71.89 57.35,71.89 OUT1.1@58.64,70.6 ; OUT1.1@58.735,70.505 60.055,71.825 67.055,71.825 OUT2.1@68.505,70.375 ; OUT2.1 69.305,71.95 77.105,71.95 OUT3.1@78.13,70.925 ; OUT3.1 79.205,72 87.005,72 SUM.1@88.03,70.975
OUT1: LF_SFF_AC_DC.OUT1 OUT0.3 OUT1.3 OUT2.3 OUT3.3 SUM.3 | length 65.1
  Top Layer w0.15: LF_SFF_AC_DC.OUT1@35.226,55.875 35.399,55.875 37.1,57.576 37.1,58.675
  Top Layer w0.3: 37.1,58.675 37.1,63.1 42.3,68.3 48.315,68.3 OUT0.3
  Bottom Layer w0.3: OUT0.3@48.74,68.06 50.03,69.35 57.35,69.35 OUT1.3@58.64,68.06 ; OUT1.3@58.735,67.965 60.055,69.285 67.055,69.285 OUT2.3@68.505,67.835 ; OUT2.3 69.305,69.41 77.105,69.41 OUT3.3@78.155,68.36 ; OUT3.3 79.205,69.46 87.005,69.46 SUM.3@88.03,68.435
OUT2: LF_SFF_AC_DC.OUT2 OUT0.5 OUT1.5 OUT2.5 OUT3.5 SUM.5 | length 62.5
  Top Layer w0.15: LF_SFF_AC_DC.OUT2@35.015,55.575 35.85,55.575 38.575,58.3 38.575,58.675
  Top Layer w0.3: 38.575,58.675 38.575,60.65 43.685,65.76 48.315,65.76 OUT0.5
  Bottom Layer w0.3: OUT0.5@48.74,65.52 50.03,66.81 57.35,66.81 OUT1.5@58.64,65.52 ; OUT1.5@58.735,65.425 60.055,66.745 67.055,66.745 OUT2.5@68.505,65.295 ; OUT2.5 69.305,66.87 77.105,66.87 OUT3.5@78.155,65.82 ; OUT3.5 79.205,66.92 87.005,66.92 SUM.5@88.03,65.895
OUT3: LF_SFF_AC_DC.OUT3 OUT0.7 OUT1.7 OUT2.7 OUT3.7 SUM.7 | length 60.6
  Top Layer w0.15: LF_SFF_AC_DC.OUT3@34.498,55.275 36.875,55.275 39.45,57.85
  Top Layer w0.3: 39.45,57.85 44.68,63.08 OUT0.7
  Bottom Layer w0.3: OUT0.7@48.74,62.98 50.03,64.27 57.35,64.27 OUT1.7@58.64,62.98 ; OUT1.7@58.735,62.885 60.055,64.205 67.055,64.205 OUT2.7@68.505,62.755 ; OUT2.7 69.305,64.33 77.105,64.33 OUT3.7@78.155,63.28 ; OUT3.7 79.205,64.38 87.005,64.38 SUM.7@88.03,63.355
OUT4: LF_SFF_AC_DC.OUT4 OUT0.9 OUT1.9 OUT2.9 OUT3.9 SUM.9 | length 59.4
  Top Layer w0.15: LF_SFF_AC_DC.OUT4 37.975,54.975 39.075,56.075
  Top Layer w0.3: 39.075,56.075 43.615,60.615 48.38,60.615 OUT0.9
  Bottom Layer w0.3: OUT0.9@48.43,60.6 49.72,61.89 57.04,61.89 OUT1.9@58.33,60.6 ; OUT1.9@58.425,60.505 59.745,61.825 66.745,61.825 OUT2.9@68.195,60.375 ; OUT2.9@67.945,60.9 68.995,61.95 76.795,61.95 OUT3.9@77.845,60.9 ; OUT3.9 79.205,61.84 87.005,61.84 SUM.9@88.03,60.815
OUT5: LF_SFF_AC_DC.OUT5 OUT0.11 OUT1.11 OUT2.11 OUT3.11 SUM.11 | length 58.5
  Top Layer w0.15: LF_SFF_AC_DC.OUT5 38.975,54.675 39.3,55
  Top Layer w0.3: 39.3,55 42.375,58.075 48.38,58.075 OUT0.11
  Bottom Layer w0.3: OUT0.11@48.705,58.1 49.995,59.39 57.315,59.39 OUT1.11@58.605,58.1 ; OUT1.11@58.7,58.005 60.02,59.325 67.02,59.325 OUT2.11@68.47,57.875 ; OUT2.11@68.22,58.4 69.27,59.45 77.07,59.45 OUT3.11@78.12,58.4 ; OUT3.11 79.205,59.3 87.005,59.3 SUM.11@88.03,58.275
OUT6: LF_SFF_AC_DC.OUT6 OUT0.13 OUT1.13 OUT2.13 OUT3.13 SUM.13 | length 57.5
  Top Layer w0.15: LF_SFF_AC_DC.OUT6 40.375,54.375 40.825,54.825
  Top Layer w0.3: 40.825,54.825 41.46,55.46 OUT0.13
  Bottom Layer w0.3: OUT0.13@49.08,55.6 50.37,56.89 57.69,56.89 OUT1.13@58.98,55.6 ; OUT1.13@59.075,55.505 60.395,56.825 67.395,56.825 OUT2.13@68.845,55.375 ; OUT2.13@68.595,55.9 69.645,56.95 77.445,56.95 78.42,55.975 OUT3.13@78.495,55.9 ; OUT3.13 79.205,56.76 87.005,56.76 SUM.13@88.03,55.735
OUT7: LF_SFF_AC_DC.OUT7 OUT0.15 OUT1.15 OUT2.15 OUT3.15 SUM.15 | length 57.5
  Top Layer w0.15: LF_SFF_AC_DC.OUT7 40.4,54.075 40.775,53.7
  Top Layer w0.3: 40.775,53.7 41.48,52.995 48.38,52.995 OUT0.15
  Bottom Layer w0.3: OUT0.15@48.74,52.82 50.03,54.11 57.35,54.11 OUT1.15@58.64,52.82 ; OUT1.15@58.735,52.725 60.055,54.045 67.055,54.045 OUT2.15@68.505,52.595 ; OUT2.15 69.305,54.17 77.105,54.17 OUT3.15@78.155,53.12 ; OUT3.15 79.205,54.22 87.005,54.22 SUM.15@88.03,53.195
OUT8: LF_SFF_AC_DC.OUT8 OUT0.17 OUT1.17 OUT2.17 OUT3.17 SUM.17 | length 58.4
  Top Layer w0.15: LF_SFF_AC_DC.OUT8 39.7,53.775 41.575,51.9
  Top Layer w0.3: 41.575,51.9 43.02,50.455 48.38,50.455 OUT0.17
  Bottom Layer w0.3: OUT0.17 49.745,51.67 57.065,51.67 OUT1.17 ; OUT1.17@58.45,50.285 59.77,51.605 66.77,51.605 OUT2.17@68.22,50.155 ; OUT2.17@67.97,50.68 69.02,51.73 76.82,51.73 OUT3.17@77.87,50.68 ; OUT3.17 79.205,51.68 87.005,51.68 SUM.17@88.03,50.655
OUT9: LF_SFF_AC_DC.OUT9 OUT0.19 OUT1.19 OUT2.19 OUT3.19 SUM.19 | length 59.4
  Top Layer w0.15: LF_SFF_AC_DC.OUT9 38.975,53.475 42.575,49.875
  Top Layer w0.3: 42.575,49.875 42.975,49.475 46.82,49.475 OUT0.19
  Bottom Layer w0.3: OUT0.19 49.745,49.13 57.065,49.13 OUT1.19 ; OUT1.19@58.45,47.745 59.77,49.065 66.77,49.065 OUT2.19@68.22,47.615 ; OUT2.19@67.97,48.14 69.02,49.19 76.82,49.19 OUT3.19@77.87,48.14 ; OUT3.19 79.205,49.14 87.005,49.14 SUM.19@88.03,48.115
OUT10: LF_SFF_AC_DC.OUT10 OUT0.21 OUT1.21 OUT2.21 OUT3.21 SUM.21 | length 60.3
  Top Layer w0.15: LF_SFF_AC_DC.OUT10 38.45,53.175 42.85,48.775
  Top Layer w0.3: 42.85,48.775 43.35,48.275 45.48,48.275 OUT0.21
  Bottom Layer w0.3: OUT0.21 49.745,46.59 57.065,46.59 OUT1.21 ; OUT1.21@58.45,45.205 59.77,46.525 66.77,46.525 OUT2.21@68.22,45.075 ; OUT2.21@67.97,45.6 69.02,46.65 76.82,46.65 OUT3.21@77.87,45.6 ; OUT3.21 79.205,46.6 87.005,46.6 SUM.21@88.03,45.575
OUT11: LF_SFF_AC_DC.OUT11 OUT0.23 OUT1.23 OUT2.23 OUT3.23 SUM.23 | length 61.2
  Top Layer w0.15: LF_SFF_AC_DC.OUT11 37.9,52.875 42.25,48.525
  Top Layer w0.3: 42.25,48.525 47.686,43.089 47.802,43.089 48.13,42.76 OUT0.23
  Bottom Layer w0.3: OUT0.23 49.745,44.05 57.065,44.05 OUT1.23 ; OUT1.23@58.45,42.665 59.77,43.985 66.77,43.985 OUT2.23@68.22,42.535 ; OUT2.23@67.97,43.06 69.02,44.11 76.82,44.11 OUT3.23@77.87,43.06 ; OUT3.23 79.205,44.06 87.005,44.06 SUM.23@88.03,43.035
OUT12: LF_SFF_AC_DC.OUT12 OUT0.25 OUT1.25 OUT2.25 OUT3.25 SUM.25 | length 62.9
  Top Layer w0.15: LF_SFF_AC_DC.OUT12 37.325,52.575 41.125,48.775
  Top Layer w0.3: 41.125,48.775 41.525,48.375 41.525,47.15 OUT0.25
  Bottom Layer w0.3: OUT0.25@48.145,40.38 49.435,41.67 56.755,41.67 OUT1.25@58.045,40.38 ; OUT1.25@58.14,40.285 59.46,41.605 66.46,41.605 OUT2.25@67.91,40.155 ; OUT2.25@67.66,40.68 68.71,41.73 76.51,41.73 OUT3.25@77.56,40.68 ; OUT3.25@78.345,40.575 79.395,41.625 87.195,41.625 SUM.25@88.22,40.6
OUT13: LF_SFF_AC_DC.OUT13 OUT0.27 OUT1.27 OUT2.27 OUT3.27 SUM.27 | length 64.8
  Top Layer w0.15: LF_SFF_AC_DC.OUT13@34.875,52.275 36.825,52.275 39.975,49.125
  Top Layer w0.3: 39.975,49.125 40.45,48.65 40.45,45.685 OUT0.27
  Bottom Layer w0.3: OUT0.27@48.42,37.88 49.71,39.17 57.03,39.17 OUT1.27@58.32,37.88 ; OUT1.27@58.415,37.785 59.735,39.105 66.735,39.105 OUT2.27@68.185,37.655 ; OUT2.27@67.935,38.18 68.985,39.23 76.785,39.23 OUT3.27@77.835,38.18 ; OUT3.27 79.205,38.98 87.005,38.98 SUM.27@88.03,37.955
OUT14: LF_SFF_AC_DC.OUT14 OUT0.29 OUT1.29 OUT2.29 OUT3.29 SUM.29 | length 66.7
  Top Layer w0.15: LF_SFF_AC_DC.OUT14 36.4,51.975 38.925,49.45
  Top Layer w0.3: 38.925,49.45 39.325,49.05 39.325,44.27 OUT0.29
  Bottom Layer w0.3: OUT0.29@48.795,35.38 50.04,36.625 57.45,36.625 OUT1.29@58.695,35.38 ; OUT1.29@58.79,35.285 60.03,36.525 67.19,36.525 OUT2.29@68.56,35.155 ; OUT2.29@68.31,35.68 69.36,36.73 77.16,36.73 78.21,35.68 79.26,36.73 87.06,36.73 SUM.29@88.085,35.705
OUT15: LF_SFF_AC_DC.OUT15 OUT0.31 OUT1.31 OUT2.31 OUT3.31 SUM.31 | length 69.1
  Top Layer w0.15: LF_SFF_AC_DC.OUT15 35.9,51.675 37.675,49.9
  Top Layer w0.3: 37.675,49.9 38.372,49.203 38.372,42.078 47.62,32.83 48.225,32.83 OUT0.31
  Bottom Layer w0.3: OUT0.31 49.745,33.89 57.065,33.89 OUT1.31 ; OUT1.31@58.45,32.505 59.77,33.825 66.77,33.825 OUT2.31@68.22,32.375 ; OUT2.31@67.97,32.9 69.02,33.95 76.82,33.95 OUT3.31@77.87,32.9 ; OUT3.31 79.205,33.9 87.005,33.9 SUM.31@88.03,32.875
PIX_INPUT: AIN3.1 LF_SFF_AC_DC.PIX_INPUT R_PIX_INPUT.1 | length 64.1
  Top Layer w0.15: 22.75,56.225 22.75,55.85 23.925,54.675 LF_SFF_AC_DC.PIX_INPUT
  Top Layer w0.3: 22.75,56.225 22.75,64.725 29,70.975 29,81.175 v1(33.075,85.25) ; v1(49.425,85.325) 49.89,85.79 AIN3.1
  Bottom Layer w0.3: v1(33.075,85.25) 49.169,85.25 49.244,85.325 v1@49.325,85.325
PW_BIAS: LF_SFF_AC_DC.PW_BIAS PW_BIAS.2 | length 66.3
  Top Layer w0.15: 24.425,49.825 24.425,51.175 24.925,51.675 LF_SFF_AC_DC.PW_BIAS
  Top Layer w0.3: PW_BIAS.2@15.64,87.8 15.84,87.6 17.125,87.6 20,84.725 20,72.125 16.2,68.325 16.2,65.475 14.725,64 14.725,47.85 19,43.575 24.375,43.575 25.55,44.75 25.55,46.95 24.425,48.075 24.425,49.825
PWR0: "LOGIC DNWELL.2" C5.1 CON1.49 CON1.50 LF_SFF_AC_DC.VDD NWELL_RING.2 | length 65.9
  Top Layer w0.15: 18.437,53.963 18.925,53.475 LF_SFF_AC_DC.VDD@25.6,53.475 ; LF_SFF_AC_DC.VDD@34.806,51.375 35.699,51.375 37.025,50.049 37.025,48.675
  Top Layer w0.3: CON1.50 CON1.49 7.43,49.3 12.125,49.3 NWELL_RING.2@12.138,49.287 ; 12.125,54.35 12.138,54.337 NWELL_RING.2@12.138,49.287 ; NWELL_RING.2 NWELL_RING.2@12.138,49.287 ; C5.1 17.775,56.275 ; 18.437,53.963 17.925,54.475 17.925,56.125 17.925,57.2 v1(19.125,58.4) ; v1(36.5,47.3) 36.5,47.311 37.025,47.836 37.025,48.675
  Bottom Layer w0.3: 12.125,54.35 12.355,54.58 12.98,54.58 16.8,58.4 v1(19.125,58.4) 19.125,57.275 24.238,52.162 24.238,49.662 27.075,46.825 35.944,46.825 36.419,47.3 v1(36.5,47.3)
PWR1: CON1.51 CON1.52 | length 1.9
  Top Layer w0.3: CON1.52 CON1.51
PWR2: CON1.53 CON1.54 | length 3.8
  Top Layer w0.3: CON1.54 CON1.53
PWR3: CON1.55 CON1.56 | length 1.9
  Top Layer w0.3: CON1.56 CON1.55
SCL: CON1.98
SDA: CON1.97
SUM_OUT: C_f.2 R_f.2 SUM_SELECT.2 U0.1 | length 21.1
  Top Layer w0.3: SUM_SELECT.2 85.19,14.8 92.1,14.8 ; U0.1 93.075,15.475 92.736,15.136 92.736,15.112 92.424,14.8 92.1,14.8 ; C_f.2 96.15,11.1 R_f.2 96.05,11.3 96.05,12.099 95.874,12.275 92.45,12.275 92.1,12.625 92.1,14.8
VCCA: C_VPP.2 CON1.1 CON1.2 CON1.95 CON1.96 CON1.99 CON1.100 U0.5 | length 180.5
  Top Layer w0.3: v1(1.3,72.225) 1.3,76.24 CON1.96 CON1.95 CON1.99 CON1.100 ; v1(2.2,66.15) 2.2,20.24 CON1.2 CON1.1 12.97,18.845 v1(23.55,29.425) ; v1@46.3,29.5 52.525,23.275 93.316,23.275 96.7,19.891 96.7,13.951 96.524,13.775 94.55,13.775 U0.5
  Bottom Layer w0.3: v1(1.3,72.225) 1.453,72.225 2.2,71.478 v1(2.2,66.15) ; v1(23.55,29.425) 25.275,31.15 44.575,31.15 v1@46.225,29.5
  other v1: 46.275,29.5
VSRC0: C3.1 CON1.71 LF_SFF_AC_DC.VRESET | length 35.1
  Top Layer w0.15: 21.936,54.589 22.45,54.075 LF_SFF_AC_DC.VRESET
  Top Layer w0.3: v1(18.375,67.575) 20.075,65.875 20.075,65.2 20.075,59.6 ; C3.1 20.025,59.65 20.075,59.6 ; 21.936,54.589 20.075,56.45 20.075,59.6
  Bottom Layer w0.3: CON1.71 5.624,63.419 5.624,63.915 9.284,67.575 v1(18.375,67.575)
VSRC1: C4.1 CON1.72 R_VSRC1.2 | length 193.9
  Top Layer w0.3: CON1.72 3.654,63.354 4.279,63.354 6.775,65.85 13.775,65.85 14.725,66.8 14.725,79.366 17.234,81.875 v1(17.3,81.875) ; R_VSRC1.2 89.65,11 89.65,10.525 91.025,9.15 C4.1 91.025,8.25 91.5,7.775 97.65,7.775 98.401,8.526 v1(98.401,22.349)
  Bottom Layer w0.3: v1(17.3,81.875) 96.225,81.875 98.401,79.699 v1(98.401,22.349)
VSRC2: CON1.73
VSRC3: CON1.74 R_VSRC3.2 | length 9.4
  Top Layer w0.3: CON1.74 4.45,65.42 4.45,65.916 6.584,68.05 9.325,68.05 9.925,67.45 R_VSRC3.2@10.975,67.45
pads on no net: CON1.L1 CON1.L2

## Polygon pours and split planes (outlines as drawn)
BACK_BIAS on Top Layer "NONET_L-01_P-001" (solid, pour order 1): 27.436,58.585 27.436,49.561 33.211,49.561 33.211,58.585
GND on Bottom Layer "NONET_L-01_P-001" (solid, pour order 0): 0,100 0,0 100,0 100,100

## Other copper
Top Layer:
  pour cut-out: 30.146,52.069 29.849,52.069 29.849,52.218 29.848,52.219 29.849,52.22 30.298,52.22 30.297,51.969 30.297,51.769 30.146,51.771
  pour cut-out: 30.146,54.69 30.146,54.987 30.295,54.987 30.296,54.988 30.297,54.987 30.297,54.538 30.046,54.538 29.846,54.538 29.848,54.69
  text "1" at 56.475,91.55 h15

## Silkscreen, mask and mechanical layers (free items; w line width, h text height)
Top Overlay:
  drawing of 105 lines, arcs and shapes, not listed
  text "BACK_BIAS" at 22.025,89.867 h1.7
  text "DIODE_HV" at 34.4,89.867 h1.7
  text "LF SFF AC/DC Rev. 1.0" at 56.228,89.825 h2.5
  text "AC" at 60.548,86.251 h2.5
  text "DC" at 70.5,86.251 h2.5
  text "R_ADC[0:3]" at 8.791,76.592 h1.5
  text "PIXEL" at 42.67,72.683 h1.52
  text "PIXEL" at 52.745,72.683 h1.52
  text "PIXEL" at 62.67,72.683 h1.52
  text "PIXEL" at 72.77,72.683 h1.52
  text "PIXEL" at 82.57,72.683 h1.52
  text "R_SUM[0:15]" at 98.071,71.7 h1.52 r270
  text "0" at 64.924,70.192 h1.52
  text "0" at 75.024,70.167 h1.52
  text "0" at 84.824,70.167 h1.52
  text "0" at 44.924,70.092 h1.52
  text "0" at 54.999,70.042 h1.52
  text "1" at 65.432,67.648 h1.52
  text "1" at 75.532,67.623 h1.52
  text "1" at 85.332,67.623 h1.52
  text "1" at 45.432,67.548 h1.52
  text "1" at 55.507,67.498 h1.52
  text "2" at 64.924,65.104 h1.52
  text "2" at 75.024,65.079 h1.52
  text "2" at 84.824,65.079 h1.52
  text "2" at 44.924,65.004 h1.52
  text "2" at 54.999,64.954 h1.52
  text "3" at 64.924,62.559 h1.52
  text "3" at 75.024,62.534 h1.52
  text "3" at 84.824,62.534 h1.52
  text "3" at 44.924,62.459 h1.52
  text "3" at 54.999,62.409 h1.52
  text "4" at 64.924,60.015 h1.52
  text "4" at 75.024,59.99 h1.52
  text "4" at 84.824,59.99 h1.52
  text "4" at 44.924,59.915 h1.52
  text "4" at 54.999,59.865 h1.52
  text "5" at 64.924,57.471 h1.52
  text "5" at 75.024,57.446 h1.52
  text "5" at 84.824,57.446 h1.52
  text "5" at 44.924,57.371 h1.52
  text "5" at 54.999,57.321 h1.52
  text "6" at 64.924,54.927 h1.52
  text "6" at 75.024,54.902 h1.52
  text "6" at 84.824,54.902 h1.52
  text "6" at 44.924,54.827 h1.52
  text "6" at 54.999,54.777 h1.52
  text "7" at 64.924,52.383 h1.52
  text "7" at 75.024,52.358 h1.52
  text "7" at 84.824,52.358 h1.52
  text "7" at 44.924,52.283 h1.52
  text "7" at 54.999,52.233 h1.52
  text "8" at 64.924,49.838 h1.52
  text "8" at 75.024,49.813 h1.52
  text "8" at 84.824,49.813 h1.52
  text "8" at 44.924,49.738 h1.52
  text "8" at 54.999,49.688 h1.52
  text "9" at 64.924,47.294 h1.52
  text "9" at 75.024,47.269 h1.52
  text "9" at 84.824,47.269 h1.52
  text "9" at 44.924,47.194 h1.52
  text "9" at 54.999,47.144 h1.52
  text "10" at 63.654,44.75 h1.52
  text "10" at 73.754,44.725 h1.52
  text "10" at 83.554,44.725 h1.52
  text "10" at 43.654,44.65 h1.52
  text "10" at 53.729,44.6 h1.52
  text "11" at 64.162,42.206 h1.52
  text "11" at 74.262,42.181 h1.52
  text "11" at 84.062,42.181 h1.52
  text "11" at 44.162,42.106 h1.52
  text "11" at 54.237,42.056 h1.52
  text "12" at 63.654,39.662 h1.52
  text "12" at 73.754,39.637 h1.52
  text "12" at 83.554,39.637 h1.52
  text "12" at 43.654,39.562 h1.52
  text "12" at 53.729,39.512 h1.52
  text "13" at 63.654,37.117 h1.52
  text "13" at 73.754,37.092 h1.52
  text "13" at 83.554,37.092 h1.52
  text "13" at 43.654,37.017 h1.52
  text "13" at 53.729,36.967 h1.52
  text "14" at 63.654,34.573 h1.52
  text "14" at 73.754,34.548 h1.52
  text "14" at 83.554,34.548 h1.52
  text "14" at 43.654,34.473 h1.52
  text "14" at 53.729,34.423 h1.52
  text "15" at 63.654,32.029 h1.52
  text "15" at 73.754,32.004 h1.52
  text "15" at 83.554,32.004 h1.52
  text "15" at 43.654,31.929 h1.52
  text "15" at 53.729,31.879 h1.52
  text "OUT0" at 12.779,17.037 h1.5
  text "OUT1" at 25.784,17.037 h1.5
  text "OUT2" at 37.774,17.037 h1.5
  text "OUT3" at 50.454,17.037 h1.5
  text "SUM" at 81.529,16.987 h1.5
  text "Arrangement" at 66.399,14.807 h1.5
  text "ADC" at 11.504,14.779 h1.3
  text "ADC" at 24.179,14.779 h1.3
  text "ADC" at 36.654,14.779 h1.3
  text "ADC" at 48.854,14.779 h1.3
  text "ADC" at 79.179,14.704 h1.3
  text "LEMO" at 15.15,14.525 h2
  text "LEMO" at 27.825,14.525 h2
  text "LEMO" at 40.3,14.525 h2
  text "LEMO" at 52.5,14.525 h2
  text "PIXEL" at 62.05,14.525 h1.52
  text "LEMO" at 82.825,14.45 h2
  text "3" at 63.2,11.825 h1.5
  text "7" at 66.25,11.825 h1.5
  text "11" at 68.8,11.825 h1.5
  text "15" at 71.475,11.825 h1.5
  text "2" at 63.175,8.8 h1.5
  text "6" at 66.15,8.8 h1.5
  text "10" at 68.475,8.8 h1.5
  text "14" at 71.55,8.8 h1.5
  text "1" at 63.45,5.825 h1.5
  text "5" at 66.275,5.825 h1.5
  text "9" at 69.15,5.825 h1.5
  text "13" at 71.475,5.825 h1.5
  text "0" at 63.175,2.825 h1.5
  text "4" at 66,2.825 h1.5
  text "8" at 69.125,2.825 h1.5
  text "12" at 71.475,2.825 h1.5
Top Solder:
  rectangle: 25.375,48.975 35.25,59.15
  text "1" at 56.475,91.55 h15
Bottom Solder:
  region: 33.361,54.69 33.658,54.69 33.658,54.541 33.659,54.54 33.658,54.539 33.209,54.539 33.21,54.79 33.21,54.99 33.361,54.988
  region: 33.361,52.069 33.361,51.772 33.212,51.772 33.211,51.771 33.21,51.772 33.21,52.221 33.461,52.22 33.661,52.22 33.659,52.069
  region: 30.146,52.069 29.849,52.069 29.849,52.218 29.848,52.219 29.849,52.22 30.298,52.22 30.297,51.969 30.297,51.769 30.146,51.771
  region: 30.146,54.69 30.146,54.988 30.295,54.988 30.296,54.988 30.297,54.988 30.297,54.538 30.046,54.539 29.846,54.539 29.848,54.69
Mechanical 1:
  lines w0.15: 0,1 0,0 0,100 100,100 ; 0.003,0.003 100,0.003 100,99.975
Mechanical 2:
  lines w0.254: 5.246,14.4 5.754,14.4 ; 5.5,14.146 5.5,14.654
  text "5.5,14.4" at 5.754,14.4 h1.52

## Text inside footprints (layer, text, board x,y; h text height)
CON1: Top Overlay "plug" at 0.805,53.845 h3 r270